# Altium PCB KAAI3020_TESTPcbDoc.PcbDoc (part 2 of 3)
Units mil, origin at the board's own origin, x right, y up, seen from the top; angles counter-clockwise.
Board outline 6000 x 5905.51 mil, 4 copper layers (Top Layer, Inner Layer L2, Inner Layer L3, Bottom Layer), stack 62.449 mil thick; 253 components, 94 nets, 550 pads, 119 vias.
Unrouted connection lines stored in the file: 5.
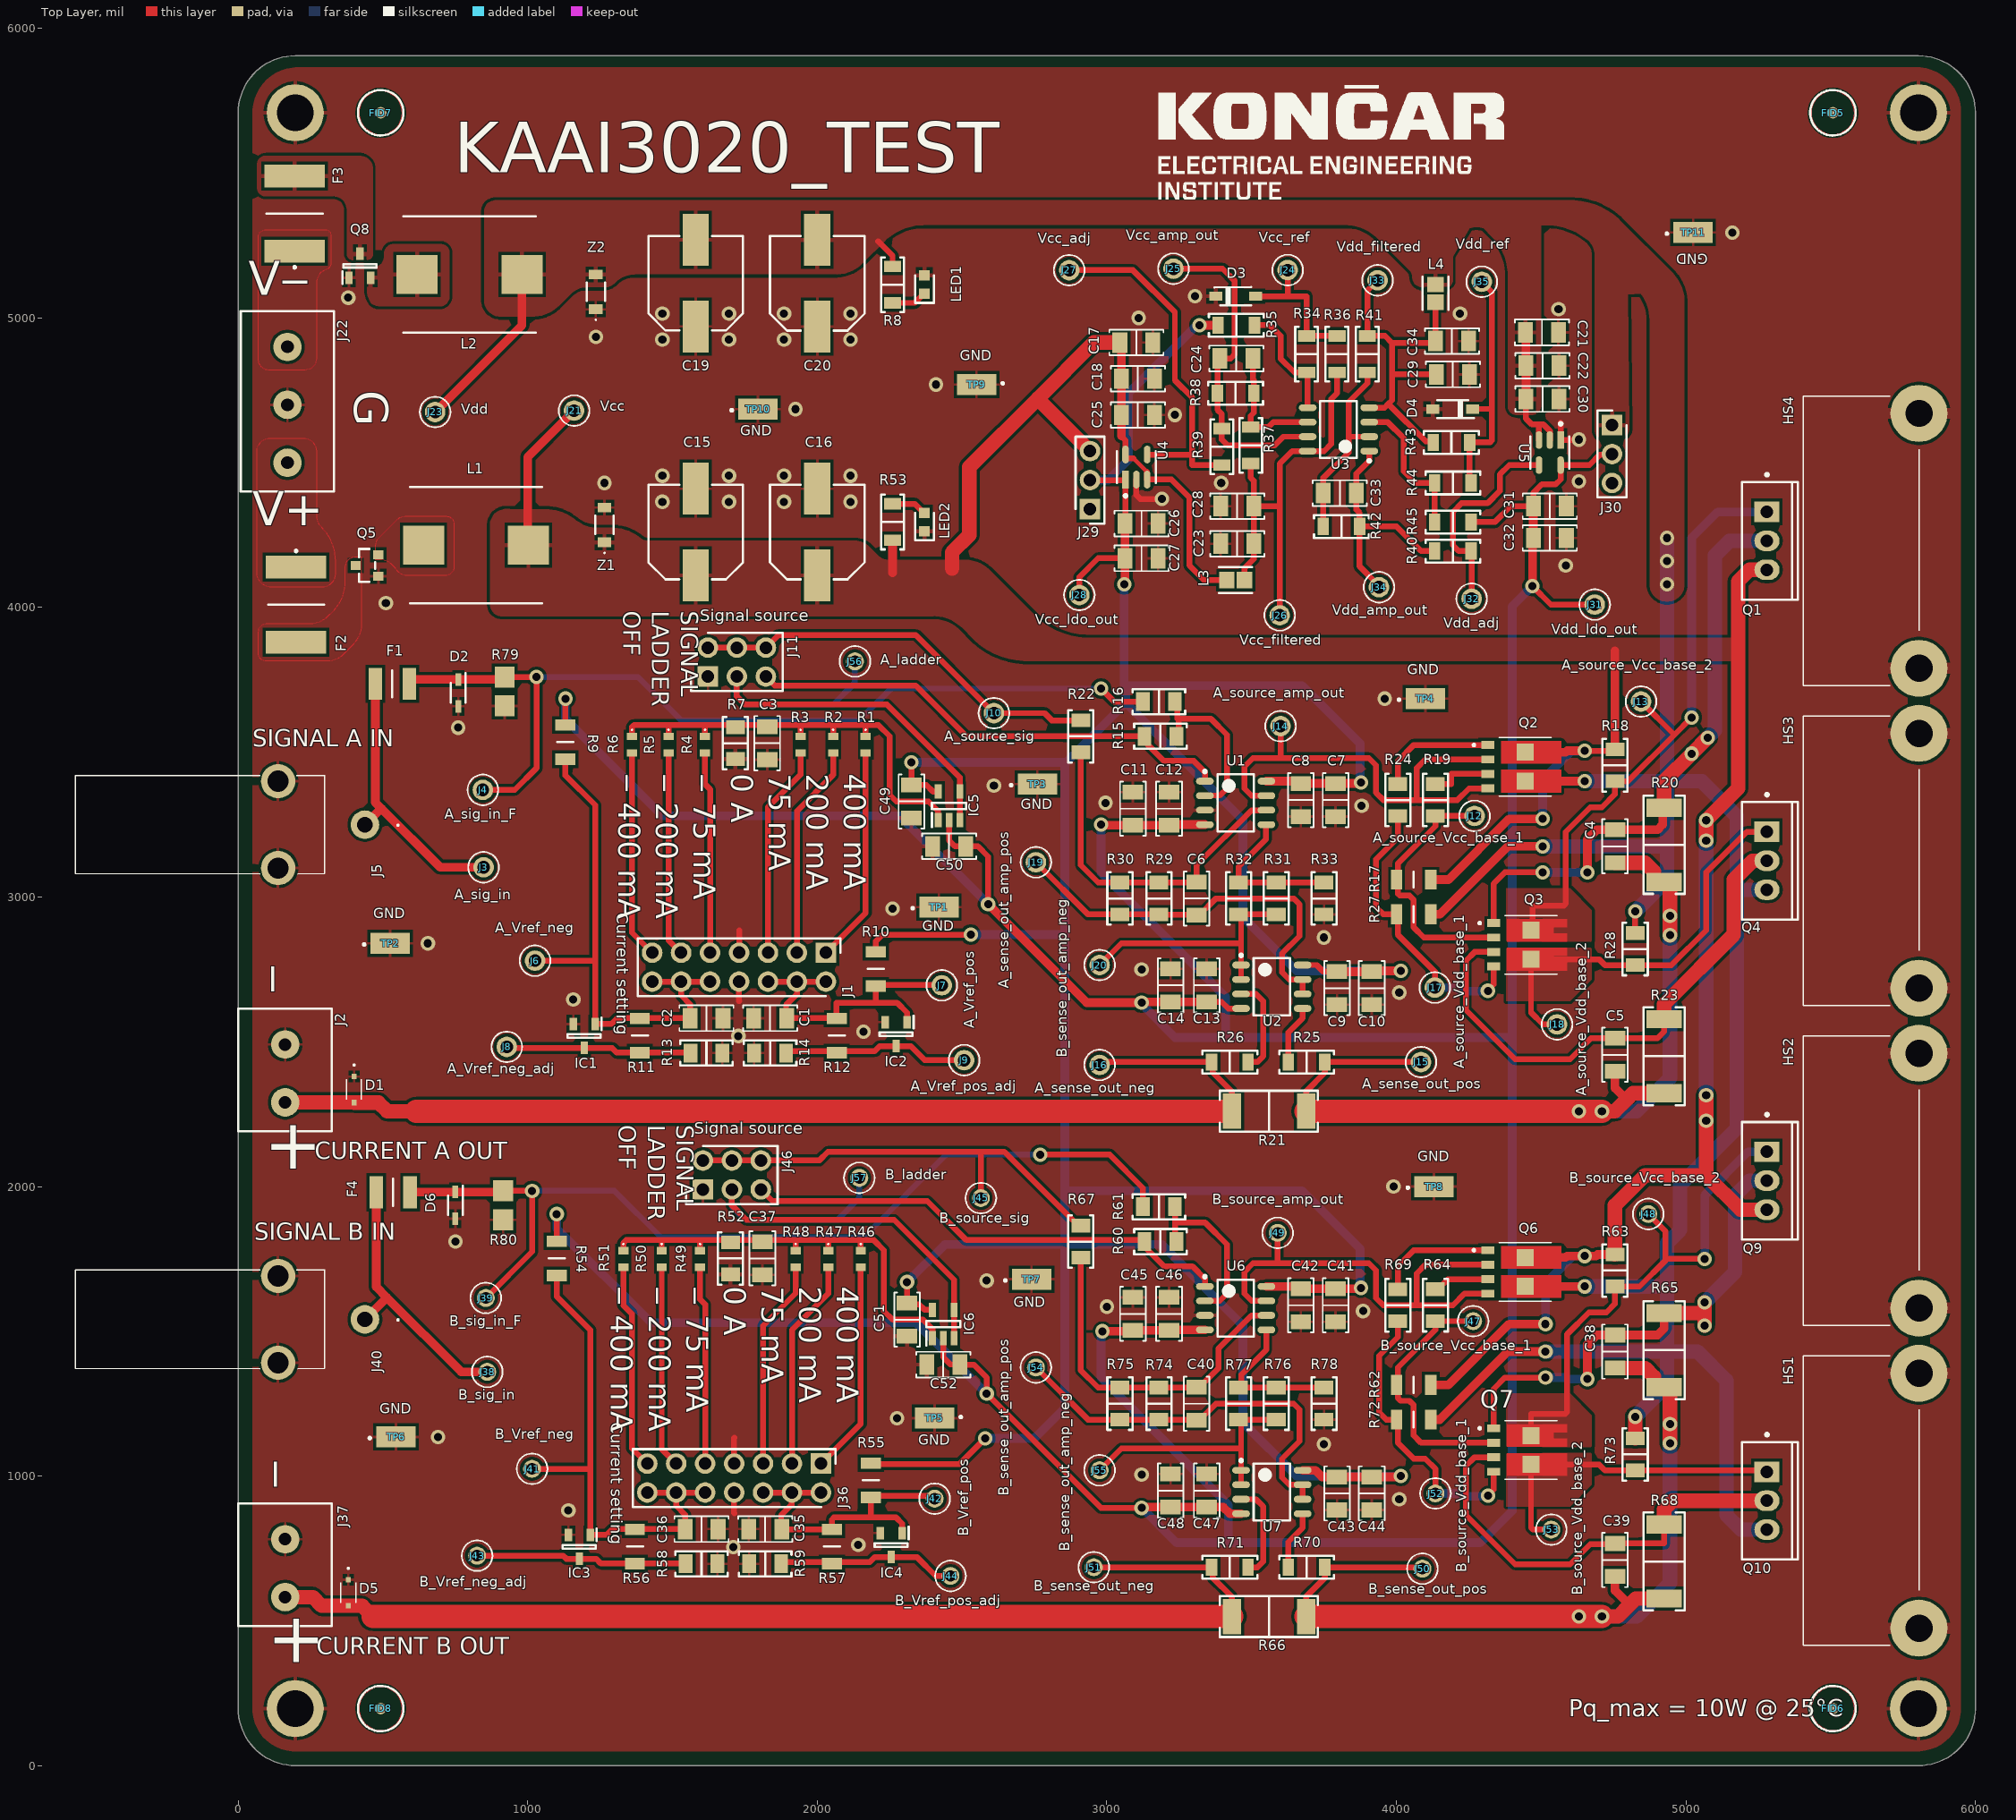
[diagram p0: Top Layer view]

## Part data (continued)
R11 R12 R56 R57: library part RT1206BRD07400RL, "Resistor", Manufacturer_Name=YAGEO, Mouser Part Number=603-RT1206BRD07400RL, Arrow Part Number=RT1206BRD07400RL, Arrow Price/Stock=null?region=nac, Datasheet Link=https://www.mouser.fr/datasheet/2/447/PYu_RT_1_to_0_01_RoHS_L_15-3461507.pdf, Height=0.65mm, Manufacturer_Part_Number=RT1206BRD07400RL, Mouser Price/Stock=https://www.mouser.co.uk/ProductDetail/YAGEO/RT1206BRD07400RL?qs=NgbZBzc1CyGp8d%2FABgImbQ%3D%3D
R15 R16 R22 R33 R60 R61 R67 R78: library part ERA-8AEB123V, "RES SMD 12K OHM 0.1% 1/4W 1206", Device Package="1206 (3216 Metric)", manufacturer="Panasonic Electronic Components", Operating Temperature="-55°C ~ 155°C", Power (Watts)="0.25W, 1/4W", Ratings=AEC-Q200, Supplier Device Package=1206, Supplier Part Number 1=10-ERA-8AEB123VCT-ND, Temperature Coefficient=±25ppm/°C, Tolerance=±0.1%, componentlink1description=Datasheet, componentlink1url=https://industrial.panasonic.com/cdbs/www-data/pdf/RDM0000/AOA0000C307.pdf, componentlink2description="DigiKey Link", componentlink2url=https://www.digikey.com/en/products/detail/panasonic-electronic-components/ERA-8AEB123V/3070775, Composition="Thin Film", Features="Automotive AEC-Q200", Height - Seated (Max)="0.028\" (0.70mm)", lastupdated="2/9/2024 20:53:53", Lifecycle Status=Active, Minimum Order=1, Number of Terminations=2, Package / Case="1206 (3216 Metric)", Packaging=TapeAndReel, Part Number=ERA-8AEB123V, Part Status=Active, partid=40988, price=0.10, Resistance="12 kOhms", Series=ERA-8A, Size / Dimension="0.126\" L x 0.063\" W (3.20mm x 1.60mm)", Supplier 1=DigiKey
R18 R28 R63 R73: library part ERJ-8GEYJ510V, "RES SMD 51 OHM 5% 1/4W 1206", Device Package="1206 (3216 Metric)", manufacturer="Panasonic Electronic Components", Operating Temperature="-55°C ~ 155°C", Power (Watts)="0.25W, 1/4W", Ratings=AEC-Q200, Supplier Device Package=1206, Supplier Part Number 1=P51ECT-ND, Temperature Coefficient=±200ppm/°C, Tolerance=±5%, componentlink1description=Datasheet, componentlink1url=http://industrial.panasonic.com/www-cgi/jvcr13pz.cgi?E+PZ+3+AOA0001+ERJ8GEYJ510V+7+WW, componentlink2description="DigiKey Link", componentlink2url=https://www.digikey.com/en/products/detail/panasonic-electronic-components/ERJ-8GEYJ510V/11678, Composition="Thick Film", Features="Automotive AEC-Q200", Height - Seated (Max)="0.028\" (0.70mm)", lastupdated="2/9/2024 20:54:16", Lifecycle Status=Active, Minimum Order=1, Number of Terminations=2, Package / Case="1206 (3216 Metric)", Packaging=TapeAndReel, Part Number=ERJ-8GEYJ510V, Part Status=Active, partid=34147, price=0.02, Resistance="51 Ohms", Series=ERJ-8G, Size / Dimension="0.126\" L x 0.063\" W (3.20mm x 1.60mm)", Supplier 1=DigiKey
R19 R24 R64 R69: library part ERJ-8GEYJ5R1V, "RES SMD 5.1 OHM 5% 1/4W 1206", Device Package="1206 (3216 Metric)", manufacturer="Panasonic Electronic Components", Operating Temperature="-55°C ~ 155°C", Power (Watts)="0.25W, 1/4W", Ratings=AEC-Q200, Supplier Device Package=1206, Supplier Part Number 1=P5.1ECT-ND, Temperature Coefficient="-100/ +600ppm/°C", Tolerance=±5%, componentlink1description=Datasheet, componentlink1url=http://industrial.panasonic.com/www-cgi/jvcr13pz.cgi?E+PZ+3+AOA0001+ERJ8GEYJ5R1V+7+WW, componentlink2description="DigiKey Link", componentlink2url=https://www.digikey.com/en/products/detail/panasonic-electronic-components/ERJ-8GEYJ5R1V/282211, Composition="Thick Film", Features="Automotive AEC-Q200", Height - Seated (Max)="0.028\" (0.70mm)", lastupdated="2/9/2024 20:54:09", Lifecycle Status=Active, Minimum Order=1, Number of Terminations=2, Package / Case="1206 (3216 Metric)", Packaging=TapeAndReel, Part Number=ERJ-8GEYJ5R1V, Part Status=Active, partid=36042, price=0.02, Resistance="5.1 Ohms", Series=ERJ-8G, Size / Dimension="0.126\" L x 0.063\" W (3.20mm x 1.60mm)", Supplier 1=DigiKey
R20 R23 R65 R68: library part CSRN2512FKR330, "RES 0.33 OHM 1% 2W 2512", Device Package="2512 (6432 Metric)", manufacturer="Stackpole Electronics Inc", Operating Temperature="-55°C ~ 155°C", Power (Watts)=2W, Supplier Device Package=2512, Supplier Part Number 1=CSRN2512FKR330CT-ND, Temperature Coefficient=±200ppm/°C, Tolerance=±1%, componentlink1description=Datasheet, componentlink1url=https://www.seielect.com/catalog/sei-csr_csrn.pdf, componentlink2description="DigiKey Link", componentlink2url=https://www.digikey.com/en/products/detail/stackpole-electronics-inc/CSRN2512FKR330/1742756, Composition="Thick Film", Features="Current Sense", Height - Seated (Max)="0.028\" (0.70mm)", lastupdated="2/17/2022 18:43:57", Lifecycle Status=Active, Minimum Order=1, Number of Terminations=2, Package / Case="2512 (6432 Metric)", Packaging=TapeAndReel, Part Number=CSRN2512FKR330, Part Status=Active, partid=1770, price=0.12, Resistance="330 mOhms", Series=CSRN, Size / Dimension="0.250\" L x 0.124\" W (6.35mm x 3.15mm)", Supplier 1=DigiKey
R21 R66: library part CSRN2512FKR500, "RES 0.5 OHM 1% 2W 2512", Device Package="2512 (6432 Metric)", manufacturer="Stackpole Electronics Inc", Operating Temperature="-55°C ~ 155°C", Power (Watts)=2W, Supplier Device Package=2512, Supplier Part Number 1=CSRN2512FKR500CT-ND, Temperature Coefficient=±200ppm/°C, Tolerance=±1%, componentlink1description=Datasheet, componentlink1url=https://www.seielect.com/catalog/sei-csr_csrn.pdf, componentlink2description="DigiKey Link", componentlink2url=https://www.digikey.com/en/products/detail/stackpole-electronics-inc/CSRN2512FKR500/1742768, Composition="Thick Film", Features="Current Sense", Height - Seated (Max)="0.028\" (0.70mm)", lastupdated="2/17/2022 18:43:58", Lifecycle Status=Active, Minimum Order=1, Number of Terminations=2, Package / Case="2512 (6432 Metric)", Packaging=TapeAndReel, Part Number=CSRN2512FKR500, Part Status=Active, partid=1683, price=0.07, Resistance="500 mOhms", Series=CSRN, Size / Dimension="0.250\" L x 0.124\" W (6.35mm x 3.15mm)", Supplier 1=DigiKey
R25 R26 R39 R40 R70 R71: library part RT1206FRE073K3L, "RES SMD 3.3K OHM 1% 1/4W 1206", Device Package="1206 (3216 Metric)", manufacturer=Yageo, Operating Temperature="-55°C ~ 155°C", Power (Watts)="0.25W, 1/4W", Supplier Device Package=1206, Supplier Part Number 1=13-RT1206FRE073K3LCT-ND, Temperature Coefficient=±50ppm/°C, Tolerance=±1%, componentlink1description=Datasheet, componentlink1url=https://www.yageo.com/upload/media/product/productsearch/datasheet/rchip/PYu-RT_1-to-0.01_RoHS_L_12.pdf, componentlink2description="DigiKey Link", componentlink2url=https://www.digikey.com/en/products/detail/yageo/RT1206FRE073K3L/1083187, Composition="Thin Film", Height - Seated (Max)="0.026\" (0.65mm)", lastupdated="7/25/2024 09:21:22", Lifecycle Status=Active, Minimum Order=1, Number of Terminations=2, Package / Case="1206 (3216 Metric)", Packaging=TapeAndReel, Part Number=RT1206FRE073K3L, Part Status=Active, partid=58380, price=0.01, Resistance="3.3 kOhms", Series=RT, Size / Dimension="0.122\" L x 0.063\" W (3.10mm x 1.60mm)", Supplier 1=DigiKey
R30 R32 R75 R77: library part ERA-8AEB102V, "RES SMD 1K OHM 0.1% 1/4W 1206", Device Package="1206 (3216 Metric)", manufacturer="Panasonic Electronic Components", Operating Temperature="-55°C ~ 155°C", Power (Watts)="0.25W, 1/4W", Ratings=AEC-Q200, Supplier Device Package=1206, Supplier Part Number 1=P1.0KBCCT-ND, Temperature Coefficient=±25ppm/°C, Tolerance=±0.1%, componentlink1description=Datasheet, componentlink1url=https://industrial.panasonic.com/cdbs/www-data/pdf/RDM0000/AOA0000C307.pdf, componentlink2description="DigiKey Link", componentlink2url=https://www.digikey.com/en/products/detail/panasonic-electronic-components/ERA-8AEB102V/3070741, Composition="Thin Film", Features="Automotive AEC-Q200", Height - Seated (Max)="0.028\" (0.70mm)", lastupdated="2/9/2024 20:54:17", Lifecycle Status=Active, Minimum Order=1, Number of Terminations=2, Package / Case="1206 (3216 Metric)", Packaging=TapeAndReel, Part Number=ERA-8AEB102V, Part Status=Active, partid=33986, price=0.10, Resistance="1 kOhms", Series=ERA-8A, Size / Dimension="0.126\" L x 0.063\" W (3.20mm x 1.60mm)", Supplier 1=DigiKey
R34 R35 R37 R38 R41 R42 R44 R45: library part RT1206FRE0710KL, "RES SMD 10K OHM 1% 1/4W 1206", Device Package="1206 (3216 Metric)", manufacturer=Yageo, Operating Temperature="-55°C ~ 155°C", Power (Watts)="0.25W, 1/4W", Supplier Device Package=1206, Supplier Part Number 1=YAG1242CT-ND, Temperature Coefficient=±50ppm/°C, Tolerance=±1%, componentlink1description=Datasheet, componentlink1url=https://www.yageo.com/upload/media/product/productsearch/datasheet/rchip/PYu-RT_1-to-0.01_RoHS_L_11.pdf, componentlink2description="DigiKey Link", componentlink2url=https://www.digikey.com/en/products/detail/yageo/RT1206FRE0710KL/1082868, Composition="Thin Film", Height - Seated (Max)="0.026\" (0.65mm)", lastupdated="7/25/2024 09:21:28", Lifecycle Status=Active, Minimum Order=1, Number of Terminations=2, Package / Case="1206 (3216 Metric)", Packaging=TapeAndReel, Part Number=RT1206FRE0710KL, Part Status=Active, partid=38903, price=0.01, Resistance="10 kOhms", Series=RT, Size / Dimension="0.122\" L x 0.063\" W (3.10mm x 1.60mm)", Supplier 1=DigiKey
R36 R43: library part RT1206FRE072K2L, "RES SMD 2.2K OHM 1% 1/4W 1206", Device Package="1206 (3216 Metric)", manufacturer=Yageo, Operating Temperature="-55°C ~ 155°C", Power (Watts)="0.25W, 1/4W", Supplier Device Package=1206, Supplier Part Number 1=13-RT1206FRE072K2LCT-ND, Temperature Coefficient=±50ppm/°C, Tolerance=±1%, componentlink1description=Datasheet, componentlink1url=https://www.yageo.com/upload/media/product/productsearch/datasheet/rchip/PYu-RT_1-to-0.01_RoHS_L_12.pdf, componentlink2description="DigiKey Link", componentlink2url=https://www.digikey.com/en/products/detail/yageo/RT1206FRE072K2L/1083103, Composition="Thin Film", Height - Seated (Max)="0.026\" (0.65mm)", lastupdated="7/25/2024 09:21:22", Lifecycle Status=Active, Minimum Order=1, Number of Terminations=2, Package / Case="1206 (3216 Metric)", Packaging=TapeAndReel, Part Number=RT1206FRE072K2L, Part Status=Active, partid=58391, price=0.01, Resistance="2.2 kOhms", Series=RT, Size / Dimension="0.122\" L x 0.063\" W (3.10mm x 1.60mm)", Supplier 1=DigiKey
R79 R80: "Resistor", Manufacturer_Name="TT Electronics", Mouser Part Number=756-TFHP1206B-50RFT5, Datasheet Link=https://www.ttelectronics.com/TTElectronics/media/ProductFiles/Datasheet/TFHP.pdf, Height=0.58mm, Manufacturer_Part_Number=TFHP1206D-50RFT5, Mouser Price/Stock=https://www.mouser.co.uk/ProductDetail/Welwyn-Components-TT-Electronics/TFHP1206D-50RFT5?qs=amGC7iS6iy%252ByF%2Fp2IEHb1w%3D%3D
TP1 TP2 TP3 TP4 TP5 TP6 TP7 TP8 TP9 TP10 TP11: library part S1751-46R, "Test Point", Manufacturer_Name=Harwin, Mouser Part Number=855-S1751-46R, Datasheet Link=https://cdn.harwin.com/pdfs/S1751R.pdf, Height=2mm, Manufacturer_Part_Number=S1751-46R, Mouser Price/Stock=https://www.mouser.co.uk/ProductDetail/Harwin/S1751-46R?qs=l6ZPVqNVZb71wETAKrfRig%3D%3D
U1 U2 U3 U6 U7: "TLV936x 10-MHz, 40-V, RRO, Operational Amplifie", componentlink1description=Datasheet, componentlink1url=https://www.ti.com/lit/ds/symlink/tlv9362.pdf
U5: library part ADP7182, "IC REG LIN NEG ADJ 200MA 5TSOT", Ambient Temperature Range High=+85°C, Ambient Temperature Range Low=-40°C, Dropout Voltage=-185mV, manufacturer="Analog Devices", Max Junction Temp=+125°C, Max Supply Voltage=-28V, Min Supply Voltage=-2.7V, Nominal Supply Current=-33/-650uA, Output Current=-200mA, Output Voltage=-1.22/-27.815V, Package=UJ-5, Temperature="-40°C to +125°C", Accuracy Percentage=1%, Automotive=No, Category=IC, componentlink2description=Datasheet, componentlink2url=https://www.analog.com/media/en/technical-documentation/data-sheets/ADP7182.pdf, Device Class L1="Integrated Circuits (ICs)", Device Class L2="Power Management ICs", Device Class L3="Voltage Regulators - Linear", Digikey Description="IC REG LIN NEG ADJ 200MA 5TSOT", Height=1mm, Ipc Land Pattern Name=SOT95P280X100-5, Lead Free=Yes, Manufacturer Part Number=ADP7182AUJZ-R7, Mouser Description="LDO Regulator Neg -1.22V to -27V 0.2A 5-Pin TSOT T/R", Number Of Outputs=1, Octopart=https://octopart.com/adp7182aujz-r7-analog+devices-21054665, Output Type=AdjustableProgrammable, RoHS=TRUE, Temperature Range High=+125°C, Temperature Range Low=-40°C
Z1 Z2: "Zener Diode", Manufacturer_Name="ROHM Semiconductor", Mouser Part Number=755-SMF15VTFTR, Datasheet Link=https://fscdn.rohm.com/en/products/databook/datasheet/discrete/diode/zener/smf15vtftr-e.pdf, Height=0.9mm, Manufacturer_Part_Number=SMF15VTFTR, Mouser Price/Stock=https://www.mouser.co.uk/ProductDetail/ROHM-Semiconductor/SMF15VTFTR?qs=HXFqYaX1Q2wU8NS9uLe0xg%3D%3D
Q6 Q7: componentlink1description=Datasheet, componentlink1url=https://assets.nexperia.com/documents/data-sheet/PHPT610030NPK.pdf, componentlink2description=Supplier, componentlink2url=https://hr.mouser.com/ProductDetail/Nexperia/PHPT610030NPKX?qs=%252BRKXB2WKlSeoXKhT5DAScw%3D%3D

## Free pads (board coordinates)
  round 196.85 hole 125.98: 1(196.85,196.85) 1(196.85,5708.66) 1(5803.15,196.85) 1(5803.15,5708.66)

## Via types
v1: diameter 50, hole 28, Top Layer to Bottom Layer, tented both sides, 117 vias
v2: diameter 50, hole 28, Top Layer to Bottom Layer, 2 vias

## Nets (pads, with @x,y where several pads share a name; then routed paths per layer and width w, separated by ;. In a path a pad name is that pad's centre, name@x,y a point inside that pad or via, vN(x,y) a via of type N, cw(c..) or ccw(c..) an arc to the next point about the centre after c; other vN are vias at no path point)
GND: C1.2 C2.1 C3.2 C7.1 C8.1 C9.2 C10.2 C11.2 C12.2 C13.2 C14.2 C15.2 C16.2 C17.1 C18.1 C19.1 C20.1 C21.2 C22.2 C23.1 C25.1 C26.1 C27.1 C28.2 C29.1 C30.1 C31.1 C32.1 C34.1 C35.2 C36.1 C37.2 C41.1 C42.1 C43.2 C44.2 C45.2 C46.2 C47.2 C48.2 C49.1 C50.2 C51.1 C52.2 D1.1 D2.2 D3.1 D4.2 D5.1 D6.2 HS1.1 HS1.2 HS2.1 HS2.2 HS3.1 HS3.2 HS4.1 HS4.2 IC1.2 IC2.2 IC3.2 IC4.2 J1.7 J1.8 J2.2 J5.2 J5.3 J11.1 J22.2 J36.7 J36.8 J37.2 J40.2 J40.3 J46.1 LED1.2 LED2.1 pad.1 Q5.1 Q8.1 R7.1 R13.1 R14.1 R33.1 R52.1 R58.1 R59.1 R78.1 R79.1 R80.1 TP1.1 TP2.1 TP3.1 TP4.1 TP5.1 TP6.1 TP7.1 TP8.1 TP9.1 TP10.1 TP11.1 U1.3 U4.2 U5.1 U6.3 Z1.2 Z2.1 | length 585.5
  Top Layer w20: J36.8@1710,940.43 J36.8@1712.68,943.1 1712.68,872.32 1713,872 ; J36.7@1712.68,1043.1 1712.68,1131.68 1713,1132 ; v1(1727.51,2519.84) v1@1729.64,2521.97 ; J1.8@1729.64,2707.6 1729.64,2640.36 1730,2640 ; J1.7@1729.64,2807.6 1730,2807.96 1730,2885 ; U4.2@3102.01,4441.68 3102.01,4387.99 3115,4375 v1(3190,4375) ; 4567,4638 4567.4,4637.6 U5.1@4567.4,4578.32 4628.32,4578.32 v1(4630,4580)
  Top Layer w30: v1(3120,1005) v1@3122.09,1007.09
  other v1: 1710,755 2141.49,762.39 1140.2,881.84 4010,920 3750,1110 690,1135 2275,1200 3885,1570 3000,1585 2585,1675 750,1810 3990,2000 2160,2535 1157.16,2646.34 4010,2670 3120,2750 655,2840 3750,2860 2260,2960 3880,3315 2995,3325 2610,3385 760,3585 3960,3685 510,4015 4585,4145 1465,4365 1695,4365 1885,4365 2115,4365 1265,4430 3395,4430 4630,4435 1465,4455 1695,4455 1885,4455 2115,4455 3235,4665 1925,4685 2410,4770 1465,4925 1695,4925 1885,4925 2115,4925 1235,4935 3110,5000 1465,5015 1695,5015 1885,5015 2115,5015 4220,5015 4560,5030 380,5070 3305,5075 5160,5295
ladder_out_A: IC5.3 IC5.4 J11.3 J56.1 | length 1696.2
  Top Layer w20: J11.3@1722.16,3761.34 1722.16,3692.84 1750,3665 2240,3665 2492.4,3412.6 IC5.4@2492.4,3364.21 IC5.3@2492.4,3265.79
  Bottom Layer w20: J11.3@1722.16,3761.34 1720,3759.18 1720,3695 1750,3665 2055,3665 2130.11,3740.11 J56.1@2130.11,3813.78
ladder_out_B: IC6.3 IC6.4 J46.3 J57.1 | length 1750.5
  Top Layer w20: J46.3@1705,1990 1705,1935 1755,1885 2265,1885 2472.4,1677.6 IC6.4@2472.4,1574.21 IC6.3@2472.4,1475.79
  Bottom Layer w20: J46.3@1705,1990 1705.2,1989.8 1705.2,1929.8 1750,1885 2070,1885 2145,1960 J57.1@2145,2030
NetC3_1: C3.1 IC5.1 R1.1 R2.1 R3.1 R4.1 R5.1 R6.1 R7.2 | length 1572.4
  Top Layer w20: R6.1@1360,3554.88 1360,3587.45 1366.88,3594.33 1486.08,3594.33 R5.1@1486.08,3554.88 ; 1492.16,3594.33 1612.16,3594.33 ; R4.1@1612.16,3554.88 1612.16,3594.33 ; R7.2@1717.16,3586.46 R7.2@1717.16,3594.33 ; R3.1@1942.16,3554.88 1942.16,3593.7 1941.53,3594.33 ; R2.1@2054.66,3554.88 2054.66,3589.67 2050,3594.33 ; R1.1@2167.16,3554.88 2167.16,3592.17 2165,3594.33 ; IC5.1@2417.6,3265.79 2416.99,3266.4 2416.99,3297.01 2384,3330 2273,3330 2250,3353 2250,3555 2210.67,3594.33 2165,3594.33 ; 1612.16,3594.33 R7.2@1717.16,3594.33 ; R7.2@1717.16,3594.33 1821.26,3594.33 C3.1@1827.16,3588.43 1833.07,3594.33 1941.53,3594.33 ; 1941.53,3594.33 2050,3594.33 ; 2050,3594.33 2165,3594.33